# Altium PCB PCB_tasty_spoon.pcbdoc
Units mil, origin at the board's own origin, x right, y up, seen from the top; angles counter-clockwise.
Board outline 2425 x 4250 mil, 2 copper layers (Top Layer, Bottom Layer); 60 components, 42 nets, 208 pads, 55 vias.
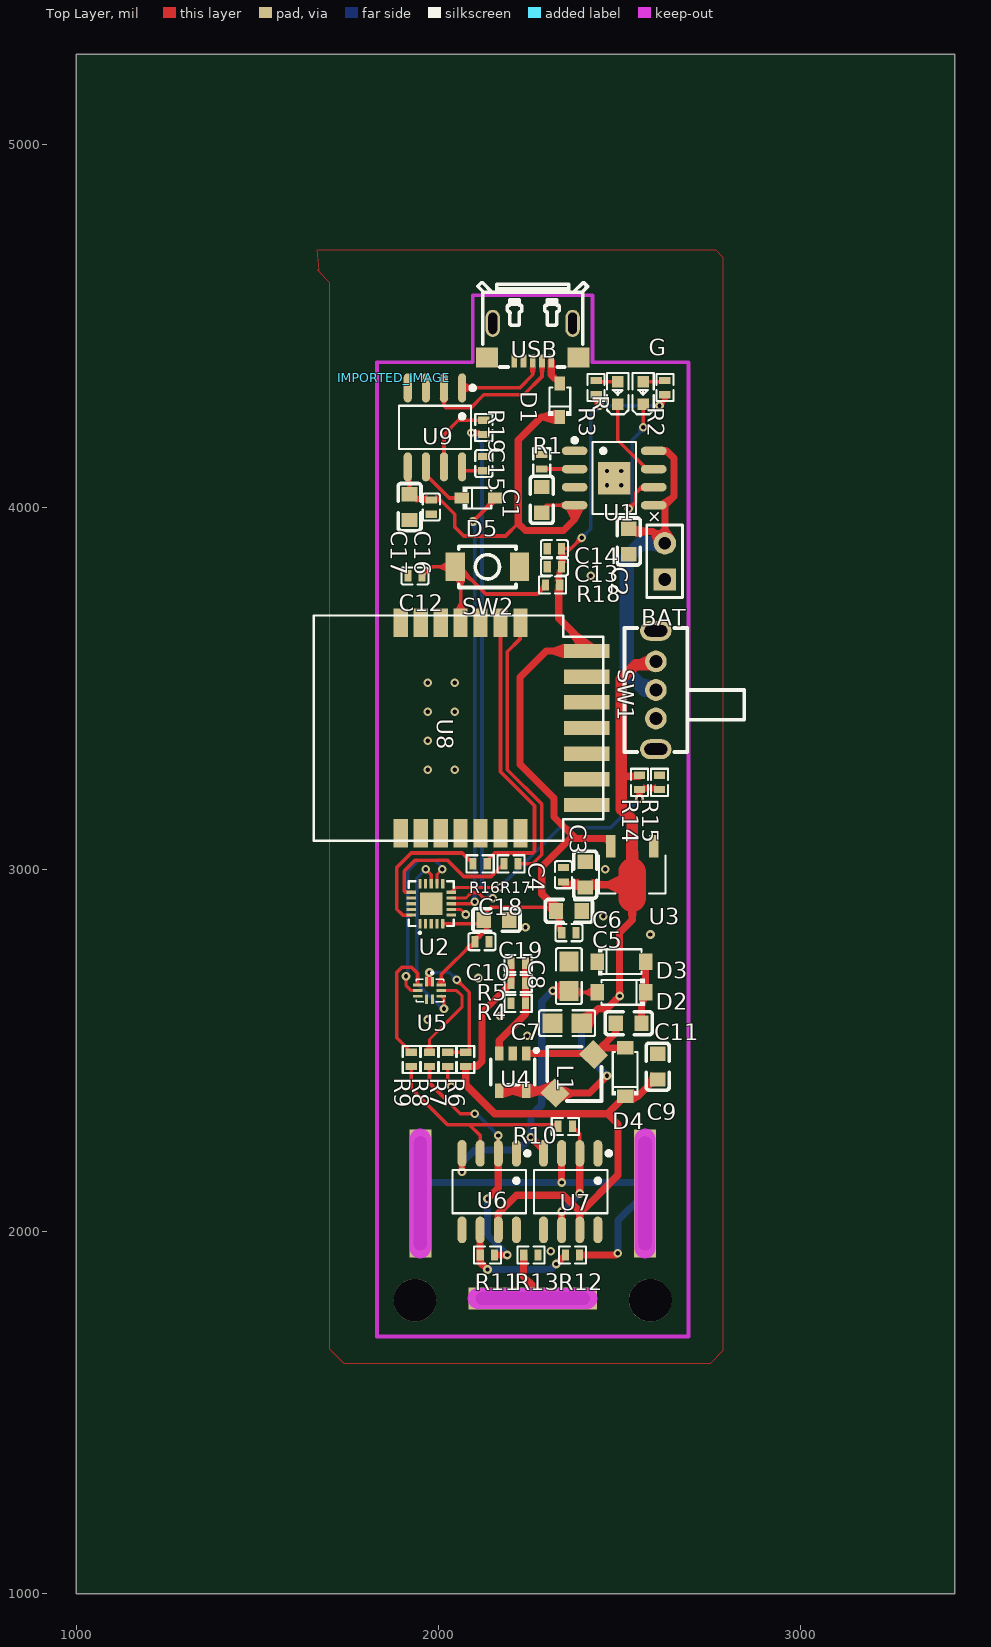
[diagram p0: Top Layer view]
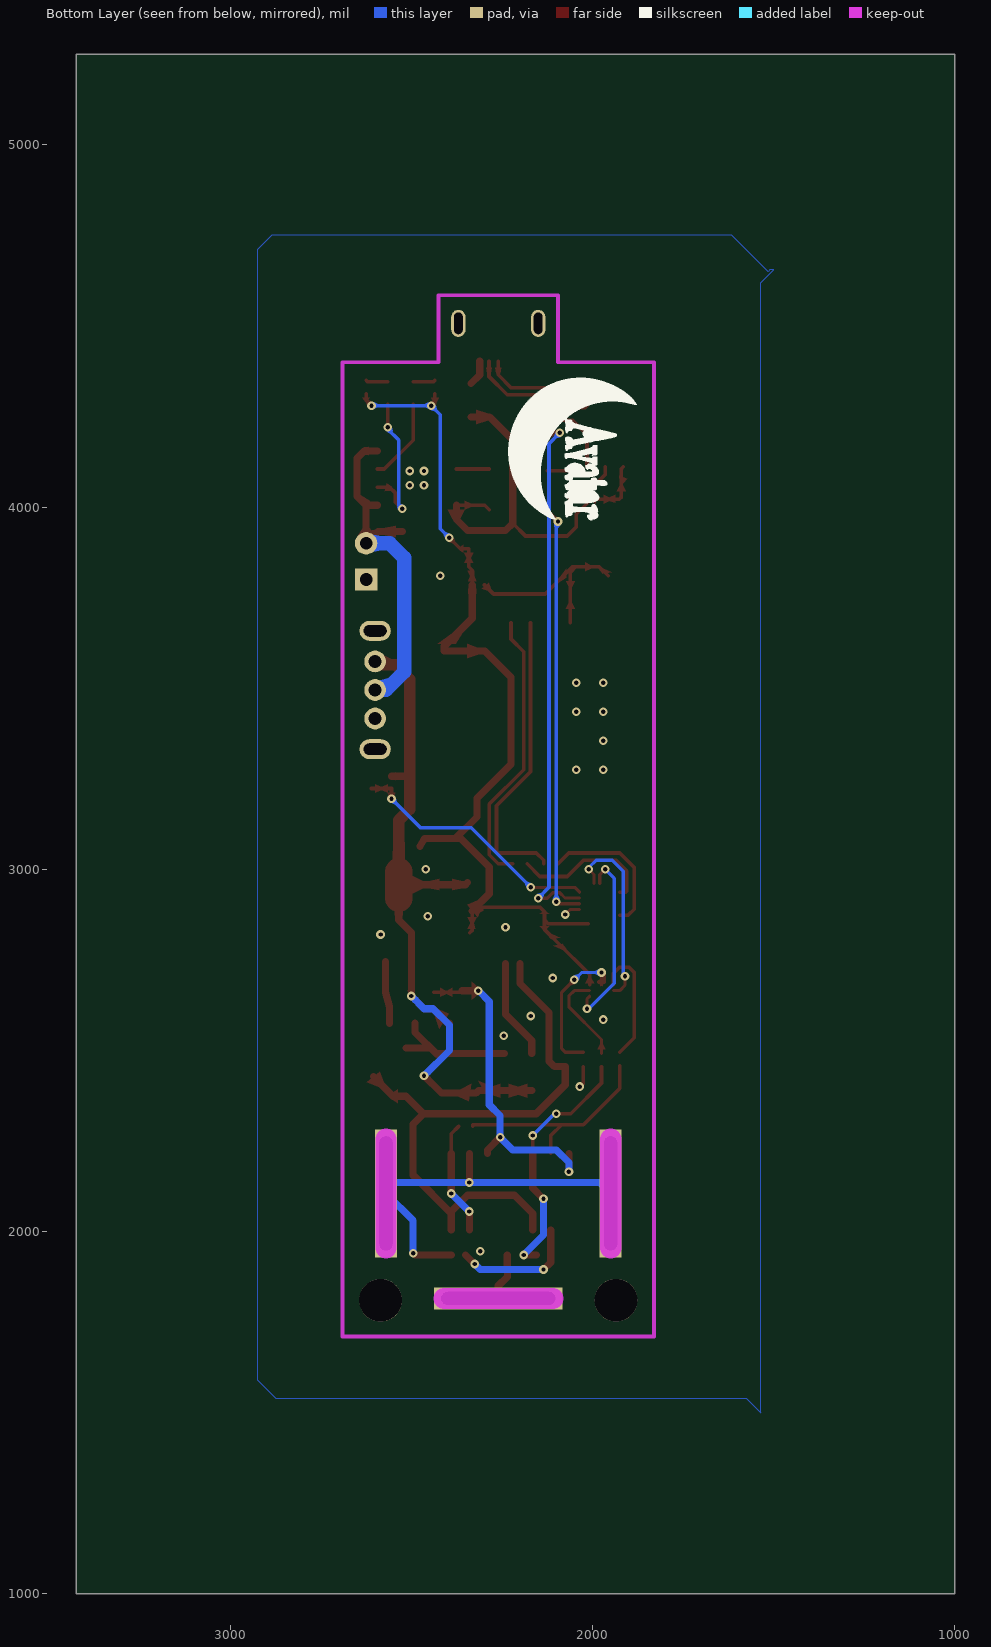
[diagram p1: Bottom Layer view, seen from below]

## Layer stack, top to bottom
Top Layer: signal copper (thickness not stored)
Dielectric: dielectric 12.6, FR-4, Dk 4.8
Bottom Layer: signal copper (thickness not stored)

## Board outline
3425,1000 1000,1000 1000,5250 3425,5250

## Components (designator, comment, footprint, x,y, rotation, side; value= is the part's Value field where it differs from the comment)
BAT "锂电池" HDR-F-2.54_1X2 2625,3850 r90 top
C1 "106" C0603 2285.03,4020 r270 top
C2 "10uF/16V" C0603 2525.03,3905 r90 top
C3 "106" C0603 2405.03,2985 r270 top
C4 "104" C0402 2344.99,2985 r270 top
C5 "104" C0402 2359.99,2825 r0 top
C6 "106" C0603 2360.03,2885 r180 top
C7 "4.7uF" C0805 2355,2575 r180 top
C8 "4.7uF" C0805 2360,2705 r270 top
C9 "1uF" C0603 2605.03,2455 r270 top
C10 "22pF" C0402 2220,2740 r180 top
C11 "1uF" C0603 2525,2575 r0 top
C12 "104/10V" C0402 1934.98,3810 r180 top
C13 "104" C0402 2319.99,3835 r0 top
C14 "103" C0402 2319.99,3885 r0 top
C15 "0.1uF/50V" C0402 2124.99,4120 r270 top
C16 "0.1uF/16V" C0402 1979.98,4000 r90 top
C17 "10uF/16V" C0603 1920.04,4000 r90 top
C18 "22uF/16V" C0603 2160.03,2860 r180 top
C19 "0.1uF/16V" C0402 2119.99,2800 r180 top
D1 "1N5819WS" SOD-323_L1.8-W1.3-LS2.5-RD 2335,4295 r90 top
D2 "MBR0530" SOD-123_L2.8-W1.8-LS3.7-RD 2505,2660 r180 top
D3 "MBR0530" SOD-123_L2.8-W1.8-LS3.7-RD 2505,2745 r0 top
D4 "MBR0530" SOD-123_L2.8-W1.8-LS3.7-RD 2515,2440 r90 top
D5 "1N5819WS" SOD-323_L1.8-W1.3-LS2.5-RD 2110,4025 r0 top
G "绿色" LED0603-RD 2565,4315 r90 top
IMPORTED_IMAGE "IMPORTED_IMAGE" IMPORTED_IMAGE 1877.84,4356.7 r0 top
L1 "6.8uH" IND-SMD_L3.8-W3.8_CDRH3D23NP 2375,2435 r270 top
R "红色" LED0603-RD 2495,4315 r90 top
R1 "2.2k" R0402 2284.96,4124.99 r270 top
R2 "102" R0402 2624.96,4329.99 r270 top
R3 "102" R0402 2434.96,4329.99 r90 top
R4 "210k/%1" R0402 2220,2630 r0 top
R5 "1.5M/%1" R0402 2220,2685 r180 top
R6 "100k/1%" R0402 2074.96,2474.99 r270 top
R7 "100k/1%" R0402 2024.96,2474.99 r90 top
R8 "10k/%1" R0402 1974.96,2474.99 r90 top
R9 "10k/%1" R0402 1924.96,2474.99 r90 top
R10 "10k/%1" R0402 2350,2290 r0 top
R11 "10k/%1" R0402 2135,1935 r180 top
R12 "39k/%1" R0402 2370,1935 r0 top
R13 "10k/%1" R0402 2254.96,1934.99 r180 top
R14 "100k/1%" R0402 2554.96,3239.99 r90 top
R15 "100k/1%" R0402 2609.96,3239.99 r270 top
R16 "100R" R0402 2115,3015 r180 top
R17 "100R" R0402 2200,3015 r180 top
R18 "100k/1%" R0402 2314.96,3784.99 r0 top
R19 "100R" R0402 2124.96,4219.99 r270 top
SW1 "SK12D07VG4" SW-TH_SK12D07VG4 2600,3495 r90 top
SW2 "TS-1088R" "SW-SMD L3.9-W3.0" 2135,3835 r0 top
U1 "XT2051Y2ASR-G" SOP-8_L4.9-W3.9-P1.27-LS6.0-BL-EP 2485,4080 r270 top
U2 "STC8G1K08-38I-QFN20" TQFN-20L_L3.0-W3.0-P0.40-BL-EP 1980,2905 r0 top
U3 "MD5333" SOT-89-3_L4.5-W2.5-P1.50-LS4.2-BR 2534.97,3009.99 r90 top
U4 "TPS61040DBVR" SOT-23-5_L3.0-W1.7-P0.95-LS2.8-BR 2205,2440 r90 top
U5 "RS2323XUTQK10" WQFN-10_L1.8-W1.4-P0.40-BL-EP 1975,2665 r180 top
U6 "OP07" SOP-8_L4.9-W3.9-P1.27-LS6.0-BL 2140,2110 r180 top
U7 "OP07" SOP-8_L4.9-W3.9-P1.27-LS6.0-BL 2365,2110 r180 top
U8 "BTU" BTU 2055,3390 r90 top
U9 "CH340N" SOP-8_L5.0-W4.0-P1.27-LS6.0-BL 1990,4220 r180 top
USB "U-F-M5DS-Y-8" MICRO-USB-SMD_U-F-M5DS-Y-8 2260,4455.03 r180 top

## Footprints (in the part's own frame and the unit in brackets; to place one, negate y for a bottom-side part, rotate by r counter-clockwise, add the part's x,y. Pads: shape width x height; smd on the part's side, far side on the other; paste and mask are expansions set on the pad)
BTU [mm]
  rect 2x1 smd: 1(-7.375,4.05) 2(-7.375,2.65) 3(-7.375,1.25) 4(-7.375,-0.15) 5(-7.375,-1.55) 6(-7.375,-2.95) 7(-7.375,-4.35) 15(7.375,-4.35) 16(7.375,-2.95) 17(7.375,-1.55) 18(7.375,-0.15) 19(7.375,1.25) 20(7.375,2.65) 21(7.375,4.05)
  rect 1x3.2 smd: 8(-5.4,-9) 9(-3.6,-9) 10(-1.8,-9) 11(0,-9) 12(1.8,-9) 13(3.6,-9) 14(5.4,-9)
  silkscreen extent -7.9,-10.15 7.9,10.15
C0402 [mm]
  rect 0.5x0.8 smd: 1(-0.5,0) 2(0.5,0)
  silkscreen extent -0.95,-0.6 0.95,0.6
C0603 [mm]
  rect 1x1.1 smd: 1(-0.9,0) 2(0.9,0)
  silkscreen extent -1.65,-0.8 1.65,0.8
C0805 [mm]
  rect 1.41x1.35 smd: 1(-1.03,0) 2(1.03,0)
  silkscreen extent -1.96,-0.9 1.96,0.9
HDR-F-2.54_1X2 [mil]
  rect 62x62 hole 35: 1(-50,0)
  round 62 hole 35: 2(50,0)
  silkscreen extent -100,-49 100,50
IMPORTED_IMAGE [mil]
IND-SMD_L3.8-W3.8_CDRH3D23NP [mm]
  rect 1.5x1.4 smd rot 45: 1(-1.35,1.35) 2(1.35,-1.35)
  silkscreen extent -1.9,-1.9 1.9,1.9
LED0603-RD [mm]
  rect 0.8x0.8 smd: 1(-0.799,-0.003) 2(0.799,0.004)
  silkscreen extent -1.49,-0.75 1.39,0.76
MICRO-USB-SMD_U-F-M5DS-Y-8 [mm]
  rect 0.4x0.9 smd: 1(-1.3,1.325) 2(-0.65,1.325) 3(0,1.325) 4(0.65,1.325) 5(1.3,1.325)
  rect 1.54x1.4 smd: 6(3.2,1.075) 7(-3.2,1.075)
  oval 1x1.9 hole 0.6 slot 1.5 at 90 deg: 8(-2.8,-1.326) 9(2.8,-1.326)
  silkscreen extent -3.85,-4.17 3.85,1.74
R0402 [mm]
  rect 0.5x0.8 smd: 1(-0.5,0) 2(0.5,0)
  silkscreen extent -0.95,-0.6 0.95,0.6
SOD-123_L2.8-W1.8-LS3.7-RD [mm]
  rect 0.95x1.15 smd: 1(-1.693,0) 2(1.693,0)
  silkscreen extent -1.63,-0.94 1.41,0.94
SOD-323_L1.8-W1.3-LS2.5-RD [mm]
  rect 1x0.75 smd: 1(-1.173,0) 2(1.173,0)
  silkscreen extent -1.08,-0.8 0.9,0.8
SOP-8_L4.9-W3.9-P1.27-LS6.0-BL [mm]
  oval 0.63x1.865 smd: 1(-1.905,-2.682) 2(-0.635,-2.682) 3(0.635,-2.682) 4(1.905,-2.682) 5(1.905,2.682) 6(0.635,2.682) 7(-0.635,2.682) 8(-1.905,2.682)
  silkscreen extent -2.82,-2.83 2.58,1.52
SOP-8_L4.9-W3.9-P1.27-LS6.0-BL-EP [mm]
  oval 0.6x1.8 smd: 1(-1.905,-2.773) 2(-0.635,-2.773) 3(0.635,-2.773) 4(1.905,-2.773) 5(1.905,2.773) 6(0.635,2.773) 7(-0.635,2.773) 8(-1.905,2.773)
  rect 2.29x2.29 smd: 9(0,0)
  silkscreen extent -2.8,-2.92 2.53,1.52
SOP-8_L5.0-W4.0-P1.27-LS6.0-BL [mil]
  oval 22.6x80.14 smd: 1(-75,-108.97) 2(-25,-108.97) 3(25,-108.97) 4(75,-108.97) 5(75,108.97) 6(25,108.97) 7(-25,108.97) 8(-75,108.97)
  silkscreen extent -110,-115 99,60
SOT-23-5_L3.0-W1.7-P0.95-LS2.8-BR [mm]
  rect 1x0.6 smd: 1(1.3,-0.95) 2(1.3,0) 3(1.3,0.95) 4(-1.3,0.95) 5(-1.3,-0.95)
  silkscreen extent -0.9,-1.78 1.65,1.55
SOT-89-3_L4.5-W2.5-P1.50-LS4.2-BR [mm]
  rect 1.575x0.672 smd: 1(1.356,-1.5) 3(1.356,1.5)
  round 0 smd: 2(-1.356,0.009)
  Top Layer region: -2.283,0.959 -0.429,0.959 -0.384,0.958 -0.34,0.955 -0.296,0.949 -0.252,0.942 -0.208,0.933 -0.165,0.921 -0.123,0.908 -0.081,0.893 -0.04,0.875 0,0.856 0.04,0.835 0.078,0.812 0.115,0.788 0.151,0.761 0.185,0.733 0.219,0.704 0.251,0.673 0.281,0.64 0.31,0.606 0.337,0.571 0.362,0.534 0.386,0.497 0.408,0.458 0.428,0.418 0.447,0.339 2.144,0.339 2.144,-0.321 0.447,-0.321 0.428,-0.401 0.408,-0.44 0.386,-0.479 0.362,-0.517 0.337,-0.553 0.31,-0.588 0.281,-0.622 0.251,-0.655 0.219,-0.686 0.185,-0.716 0.151,-0.744 0.115,-0.77 0.078,-0.795 0.04,-0.818 0,-0.839 -0.04,-0.858 -0.081,-0.875 -0.123,-0.89 -0.165,-0.904 -0.208,-0.915 -0.252,-0.925 -0.296,-0.932 -0.34,-0.937 -0.384,-0.94 -0.429,-0.941 -2.283,-0.941 -2.328,-0.94 -2.372,-0.937 -2.416,-0.932 -2.46,-0.925 -2.504,-0.915 -2.547,-0.904 -2.589,-0.89 -2.631,-0.875 -2.672,-0.858 -2.713,-0.839 -2.752,-0.818 -2.79,-0.795 -2.827,-0.77 -2.863,-0.744 -2.898,-0.716 -2.931,-0.686 -2.963,-0.655 -2.993,-0.622 -3.022,-0.588 -3.049,-0.553 -3.075,-0.517 -3.098,-0.479 -3.12,-0.44 -3.141,-0.401 -3.159,-0.36 -3.175,-0.318 -3.189,-0.276 -3.202,-0.233 -3.212,-0.19 -3.22,-0.146 -3.227,-0.102 -3.231,-0.058 -3.233,-0.013 -3.233,0.031 -3.231,0.076 -3.227,0.12 -3.22,0.164 -3.212,0.208 -3.202,0.251 -3.189,0.294 -3.175,0.336 -3.159,0.377 -3.141,0.418 -3.12,0.458 -3.098,0.497 -3.075,0.534 -3.049,0.571 -3.022,0.606 -2.993,0.64 -2.963,0.673 -2.931,0.704 -2.898,0.733 -2.863,0.761 -2.827,0.788 -2.79,0.812 -2.752,0.835 -2.713,0.856 -2.672,0.875 -2.631,0.893 -2.589,0.908 -2.547,0.921 -2.504,0.933 -2.46,0.942 -2.416,0.949 -2.372,0.955 -2.328,0.958
  silkscreen extent -1.95,-2.33 0.7,2.33
"SW-SMD L3.9-W3.0" [mm]
  rect 1.35x2 smd: 1(-2.25,0) 2(2.25,0)
  silkscreen extent -2,-1.45 2,1.45
SW-TH_SK12D07VG4 [mil]
  round 60 hole 36: 1(-78.74,0) 2(0,0) 3(78.74,0)
  oval 55.12x86.61 hole 31.5 slot 62.99 at 90 deg: 4(163.38,0) 5(-163.39,0)
  silkscreen extent -171,-244 171,87
TQFN-20L_L3.0-W3.0-P0.40-BL-EP [mm]
  rect 0.224x0.665 smd: 1(-0.8,-1.407) 2(-0.4,-1.407) 3(0,-1.407) 4(0.4,-1.407) 5(0.8,-1.407) 11(0.8,1.407) 12(0.4,1.407) 13(0,1.407) 14(-0.4,1.407) 15(-0.8,1.407)
  rect 0.665x0.224 smd: 6(1.407,-0.8) 7(1.407,-0.4) 8(1.407,0) 9(1.407,0.4) 10(1.407,0.8) 16(-1.407,0.8) 17(-1.407,0.4) 18(-1.407,0) 19(-1.407,-0.4) 20(-1.407,-0.8)
  rect 1.6x1.6 smd: 21(0,0)
  silkscreen extent -1.58,-2.11 1.58,1.58
WQFN-10_L1.8-W1.4-P0.40-BL-EP [mm]
  rect 0.2x0.665 smd: 1(-0.2,-0.607) 2(0.2,-0.607) 6(0.2,0.607) 7(-0.2,0.607)
  rect 0.665x0.2 smd: 3(0.832,-0.4) 4(0.832,0) 5(0.832,0.4) 8(-0.832,0.4) 9(-0.832,0) 10(-0.832,-0.4)
  silkscreen extent -0.99,-1.31 0.93,0.79

## Free pads (board coordinates)
  rect 60x354.33 hole 36 slot 314.96 at 90 deg: 2(1950,2105) 2(2570,2105)
  rect 354.33x60 hole 36 slot 314.96 at 0 deg: 2(2260,1815)
  round 118.11 hole 118.11 unplated: ""(1935,1810) ""(2585,1810)

## Via types
v1: diameter 24, hole 12, Top Layer to Bottom Layer, 55 vias

## Nets (pads, with @x,y where several pads share a name; then routed paths per layer and width w, separated by ;. In a path a pad name is that pad's centre, name@x,y a point inside that pad or via, vN(x,y) a via of type N, cw(c..) or ccw(c..) an arc to the next point about the centre after c; other vN are vias at no path point)
3V3: C5.1 C6.2 C13.2 C14.2 C18.2 C19.2 R2.2 R3.1 R18.2 U2.5 U3.3 U5.10 U8.14 | length 2765.9
  Top Layer w10: U5.10 2007.8,2709.2 2098.5,2800 2132.4,2833.9 C18.2@2132.4,2860 ; U2.5 2121.99,2849.59 C18.2@2132.4,2860 ; C6.2@2332,2885 2332,2895 2144.8,2895 2132.4,2882.6 C18.2@2132.4,2860 ; R18.2@2332,3785 2332,3825.6 2341.5,3835 2341.5,3885 2365,3885 v1(2395,3915) ; C6.2@2332.4,2885 2332.4,2831.1 C5.1@2338.5,2825 ; R3.1@2435,4313 2435,4290 v1(2445,4280) ; v1(2610,4280) 2625,4295 R2.2@2625,4313
  Top Layer w19.68: R18.2@2332,3785 2332,3693 2409.3,3615.7 U8.14 ; C6.2@2332.4,2885 2285,2932.4 2285,3006.3 2363.5,3084.8 2378.7,3084.7 ; U8.14@2408,3602.3 2297.3,3602.3 2225,3530 2225,3290 2318.7,3196.3 2318.7,3144.7 2378.7,3084.7 ; U3.3 2463.7,3084.7 2378.7,3084.7
  Bottom Layer w10: v1(2395,3915) 2420,3940 2420,4255 v1(2445,4280) v1(2610,4280)
5V: R6.1 R7.2 U5.1 U5.2 | length 397.4
  Top Layer w8.66: U5.2 1967.1,2707.1 v1(1975,2715) ; v1(2050,2695) 2085,2660 2085,2504.7 R6.1
  Top Layer w10: U5.2 U5.1 ; R7.2 R6.1
  Bottom Layer w8.66: v1(1975,2715) 2030,2715 v1(2050,2695)
ADC_VOLT: R14.1 R15.2 U2.10 | length 709.7
  Top Layer w8.66: U2.10 2048.91,2950 v1(2170,2950)
  Top Layer w10: v1(2555,3195) 2555,3223 R15.2@2610,3223
  Bottom Layer w10: v1(2170,2950) 2335,3115 2475,3115 v1(2555,3195)
C10_1: C10.1 R4.2 R5.1 U4.3 | length 278.7
  Top Layer w19.68: U4.3 2167.6,2527.6 2239.7,2599.7 R4.2 R5.1 C10.1
C11_1: C11.1 D4.2 L1.1 U4.1 | length 393.8
  Top Layer w19.68: U4.1 2425.12,2491.18 L1.1@2428.15,2488.15 ; C11.1 2489.57,2549.57 L1.1@2428.15,2488.15 ; D4.2 2446.63,2506.63 L1.1@2428.15,2488.15
C11_2: C11.2 D2.1 D3.2 | length 171.7
  Top Layer w19.68: C11.2 2560,2620 D2.1 D3.2
C15_2: C15.2 U9.8 | length 70.7
  Top Layer w10: U9.8 2065,4100.3 C15.2
D1_2: D1.2 USB.1 | length 71.6
  Top Layer w19.68: USB.1 2311.2,4365 D1.2
D5_1: D5.1 U9.6 | length 146.8
  Top Layer w10: U9.6 1965,4090 2030,4025 D5.1
D+: U9.1 USB.3 | length 247.8
  Top Layer w10: U9.1 2224,4329 2260,4365 USB.3
D-: U9.2 USB.2 | length 399.4
  Top Layer w10: U9.2 2015,4280 2020,4275 2090,4275 2125,4310 2235,4310 2285.6,4360.6 USB.2
G_2: G.2 R2.1 | length 61.4
  Top Layer w10: G.2 2621.76,4346.47 R2.1
GND: BAT.1 C1.1 C2.1 C3.1 C4.1 C5.2 C6.1 C7.2 C8.1 C9.1 C12.2 C13.1 C14.1 C15.1 C16.1 C17.1 C18.1 C19.1 D3.1 R1.1 R4.1 R7.1 R13.1 R15.1 SW1.4 SW1.5 SW2.2 U1.1 U1.3 U1.9 U2.7 U3.1 U4.2 U5.5 U5.6 U5.7 U8.13 U9.3 USB.4 USB.5 USB.6 USB.7 USB.8 USB.9 | length 105
  Top Layer w8.66: U2.7@2035.41,2889.25 2060.75,2889.25 v1(2075,2875)
  Top Layer w10: R7.1 2024.96,2410.04 v1(2035,2400)
  other v1: 2310,1945 2245,2540 1970,2585 2170,2595 2110,2700 2585,2820 2240,2840 2455,2870 2460,3000 1970,3275 2045,3275 1970,3355 1970,3435 2045,3435 1970,3515 2045,3515 2420,3810 2465.31,4060.31 2504.68,4060.31 2465.31,4099.68 2504.68,4099.68
IN1: U2.12 U5.4 | length 524.4
  Top Layer w8.66: v1(1910,2705) 1910,2680 1925,2665 U5.4@1942,2665 ; U2.12@1995.75,2960.41 1995.75,2985.75 v1(2010,3000)
  Bottom Layer w8.66: v1(1910,2705) 1915,2705 1915,2995 1945,3025 1990,3025 2010,3005 v1(2010,3000)
IN2: U2.13 U5.8 | length 512.4
  Top Layer w8.66: v1(1965,3000) 1980,2985 U2.13 ; U5.8 2015,2642.1 v1(2015,2615)
  Bottom Layer w8.66: v1(1965,3000) 1940,2975 1940,2685 2010,2615 v1(2015,2615)
LED1: G.1 U1.6 | length 413.8
  Top Layer w10: v1(2525,3995) 2545,4015 2545,4040 2560,4055 U1.6 ; v1(2565,4220) 2565.14,4220.14 G.1
  Bottom Layer w10: v1(2525,3995) 2535,4005 2535,4185 2565,4215 v1(2565,4220)
LED2: R.1 U1.7 | length 230.8
  Top Layer w10: R.1 2495.14,4184.86 2575,4105 U1.7
P1: pad.2@2260,1815 R13.2 | length 130.4
  Top Layer w19.68: R13.2 2235,1875 2260,1850 pad.2@2260,1815
P2: pad.2@1950,2105 pad.2@2570,2105 R12.2 U7.3 | length 1016.5
  Top Layer w19.68: v1(2340,2135) U7.3 ; R12.2 2490,1935 v1(2495,1940)
  Bottom Layer w19.68: pad.2@1950,2105 1980,2135 v1(2340,2135) pad.2@2570,2135 ; v1(2495,1940) 2495,2030 pad.2@2570,2105
R1_2: R1.2 U1.2 | length 90.8
  Top Layer w10: R1.2 U1.2
R3_2: R3.2 R.2 | length 61.2
  Top Layer w10: R3.2 2438.16,4346.48 R.2
R8_1: R8.1 R11.1 U6.2 | length 679.8
  Top Layer w10: R8.1 1974.96,2410.04 2060,2325 v1(2100,2325) ; U6.2@2165,2231.68 v1(2165,2265)
  Top Layer w19.68: v1(2135,2090) 2165,2120 U6.2 ; R11.1 v1(2190,1935)
  Bottom Layer w10: v1(2100,2325) 2105,2325 v1(2165,2265)
  Bottom Layer w19.68: v1(2135,2090) 2135,1990 v1(2190,1935)
R10_2: R10.2 U7.2 U7.6 | length 314.7
  Top Layer w10: R10.2 2390,2269.68 U7.2
  Top Layer w19.68: U7.6 v1(2340,2055) ; v1(2390,2105) U7.2
  Bottom Layer w19.68: v1(2340,2055) v1(2390,2105)
R11_2: R11.2 R12.1 U6.6 | length 349.7
  Top Layer w19.68: U6.6 2115,1935 R11.2 2115.32,1914.68 v1(2135,1895) ; v1(2325,1910) 2325.31,1910 R12.1
  Bottom Layer w19.68: v1(2135,1895) 2310,1895 v1(2325,1910)
R19_1: R19.1 U9.7 | length 215.4
  Top Layer w10: U9.7 2015,4200 2054.67,4239.67 R19.1
RXD: D5.2 U2.8 | length 1207
  Top Layer w8.66: U2.8 v1@2100,2905
  Top Layer w10: v1(2095,3960) 2156.2,4021.2 D5.2
  Bottom Layer w10: v1(2095,3960) 2100,3955 2100,2955 v1(2100,2910)
RXD1: R17.2 U2.16 | length 396.9
  Top Layer w10: U2.16 1908.5,2936.5 1905,2940 1905,2995 1935,3025 2025,3025 2070,2980 2145.3,2980 R17.2
S$2487: 
S$4958: 
TXD: R19.2 U2.9 | length 1472.4
  Top Layer w8.66: U2.9@2035.41,2920.75 2075.98,2920.75 2090.23,2935 2110,2935 2125,2920 v1(2150,2920)
  Top Layer w10: v1(2090,4205) 2123,4205 R19.2@2125,4203
  Bottom Layer w10: v1(2090,4205) 2120,4175 2120,2950 v1(2150,2920)
TXD1: R16.2 U2.20 | length 400.7
  Top Layer w10: U2.20 1901.5,2873.5 1885,2890 1885,3005 1925,3045 2065.31,3045 R16.2
U6_3: R9.1 R10.1 U6.3 | length 619.6
  Top Layer w10: R9.1@1925,2458 1925,2395 2025,2295 2330.3,2295 R10.1 ; 2071.98,2295 2085,2295 2115,2265 U6.3
U8_15: R17.1 U8.15 | length 769.5
  Top Layer w10: R17.1 2260,3015 2285,3040 2285,3180 2190,3275 2190,3600.9 2225,3635.9 U8.15@2225,3680
U8_16: R16.1 U8.16 | length 819.7
  Top Layer w10: R16.1 2134.7,3024.7 2155,3045 2260,3045 2265,3050 2265,3175 2171.1,3268.9 U8.16@2171.1,3680.3
U8_18: C12.1 R18.1 SW2.1 U8.18 | length 554
  Top Layer w10: C12.1@1956.5,3810 1981.5,3835 SW2.1 ; U8.18@2060.9,3680.3 2060.9,3820.5 SW2.1 ; R18.1@2298,3785 2273,3760 2130,3760 2055,3835 SW2.1
USB_5V: C1.2 C16.2 C17.2 D1.1 U1.4 U9.5 | length 1148.5
  Top Layer w10: U9.5 1920,4106 1920,4027.6 1926.1,4021.5 1980,4021.5 2003.5,4021.5 2045,3980 2045,3945 2070,3920 2185,3920 2220,3955 ; C1.2@2285,3992.4 2297.6,4005 U1.4
  Top Layer w19.68: D1.1 2283.8,4248.8 2220,4185 2220,3955 2240,3935 2345,3935 2375.8,3965.8 U1.4
V+: R9.2 U5.3 | length 339.5
  Top Layer w10: R9.2 1885,2534.6 1885,2715 1900,2730 1925,2730 1942.2,2712.8 U5.3
V-: R8.2 U5.9 | length 258.7
  Top Layer w8.66: R8.2@1975,2492 1975,2530 2065,2620 2065,2650 2050,2665 U5.9
VBAT: BAT.2 C2.2 SW1.2 U1.5 U1.8 | length 1021.8
  Top Layer w19.68: C2.2@2525,3932.6 2592.4,3932.6 BAT.2 U1.5@2625,4005 ; U1.8 2630,4155 2650,4135 2650,4030 U1.5@2625,4005 ; U1.5@2625,4005 U1.5 U1.5@2625,4005
  Bottom Layer w39.37: SW1.2 2570,3495 2520,3545 2520,3860 2560,3900 BAT.2
VBAT_BOOST_10V: C9.2 C10.2 D4.1 R5.2 R6.2 U6.7 U7.7 | length 1746.6
  Top Layer w19.68: R6.2 2105.3,2455.3 2120,2470 2120,2604.68 R5.2 C10.2 ; R6.2 2075,2405 2155,2325 2466.6,2325 ; U6.7 2165,2050 2215,2100 2345,2100 2390,2055 U7.7 2390,2050 2495,2155 2495,2296.6 2466.6,2325 ; C9.2@2605,2427.4 2560.9,2383.3 2550.9,2373.4 D4.1 2466.6,2325
VBAT_BOOST_-10V: C8.2 D2.2 U6.4 U7.4 | length 908.8
  Top Layer w10: C8.2@2360,2664.5 2364.5,2660 D2.2
  Top Layer w19.68: v1(2065,2165) U6.4 ; v1(2255,2260) 2290,2225 U7.4 ; v1(2315,2665) 2315.5,2664.5 C8.2@2360,2664.5
  Bottom Layer w19.68: v1(2065,2165) 2065,2190 2100,2225 2220,2225 v1(2255,2260) 2255,2320 2285,2350 2285,2635 v1(2315,2665)
VBAT_OUT: C3.2 C4.2 C7.1 L1.2 R14.2 SW1.3 U3.2 U4.4 U4.5 | length 2022.2
  Top Layer w19.68: U4.4 U4.5 2314.9,2388.8 2321.9,2381.9 2416.9,2381.9 v1(2465,2430) ; C4.2@2345,2963.5 2351.1,2957.4 2405,2957.4 2533.8,2957.4 2534.7,2956.6 2534.7,2859.7 2500,2825 v1(2500,2650) 2465,2615 2440,2615 2400,2575 C7.1@2395.5,2575 ; 2505,3257 R14.2@2555,3257
  Top Layer w31.5: 2534.7,2956.6 2534.7,3135.3 2505,3165 2505,3525 2545,3565 2591.3,3565 SW1.3
  Bottom Layer w19.68: v1(2465,2430) 2395,2500 2395,2570 2440,2615 2465,2615 v1(2500,2650)
pads on no net: SW1.1 U2.1 U2.2 U2.3 U2.4 U2.6 U2.11 U2.14 U2.15 U2.17 U2.18 U2.19 U2.21 U6.1 U6.5 U6.8 U7.1 U7.5 U7.8 U8.1 U8.2 U8.3 U8.4 U8.5 U8.6 U8.7 U8.8 U8.9 U8.10 U8.11 U8.12 U8.17 U8.19 U8.20 U8.21 U9.4

## Polygon pours and split planes (outlines as drawn)
GND on Bottom Layer (solid): 1615,4750 2885,4750 2925,4710 2925,1590 2875,1540 1575,1540 1535,1500 1535,4620 1500,4655 1510,4655 1515,4650
GND on Top Layer (solid): 1665,4710 2765,4710 2785,4690 2785,1670 2750,1635 1740,1635 1700,1675 1700,4620 1665,4655 1670,4655

## Other copper
Top Layer:
  region net VBAT_OUT: 2585.43,3547.52 2575.8,3591.47 2556.65,3580.75 2563.55,3549.25
  region net VBAT: 2648.25,3920.5 2601.75,3920.5 2615.16,3942.2 2634.84,3942.2
  region net VBAT: 2594.06,3898.06 2626.94,3930.94 2602.12,3936.8 2588.2,3922.88
  region net 3V3: 2445.75,4291.98 2433.02,4279.25 2431.46,4286.46 2438.54,4293.54
  region net 3V3: 2621.98,4279.25 2609.25,4291.98 2618.02,4295.09 2625.09,4288.02
  region net TXD: 2097.94,4196 2097.94,4214 2106.34,4210 2106.34,4200
  region net RXD: 2106.98,3959.25 2094.25,3971.98 2103.02,3975.09 2110.09,3968.02
  region net ADC_VOLT: 2546,3202.94 2564,3202.94 2560,3211.34 2550,3211.34
  region net LED1: 2536.98,3994.25 2524.25,4006.98 2533.02,4010.09 2540.09,4003.02
  region net 3V3: 2395.75,3903.02 2383.02,3915.75 2379.91,3906.98 2386.98,3899.91
  region net VBAT_BOOST_-10V: 2323.24,2673.73 2322.63,2655.74 2331,2654.61 2331.66,2674.29
  region net VBAT_OUT: 2465.75,2418.02 2453.02,2430.75 2446.49,2425.41 2460.41,2411.49
  region net VBAT_OUT: 2500.75,2638.02 2488.02,2650.75 2481.49,2645.41 2495.41,2631.49
  region net VBAT_OUT: 2491,2657.94 2509,2657.94 2509.84,2666.34 2490.16,2666.34
  region net 5V: 2061.98,2695.75 2049.25,2683.02 2058.49,2680.39 2064.61,2686.51
  region net 5V: 1963.29,2712.38 1979.06,2703.71 1971.46,2698.3 1962.8,2703.06
  region net VBAT: 2542.72,3948.31 2542.72,3916.81 2572.24,3922.72 2572.24,3942.4
  region net VBAT_OUT: 2422.72,2973.19 2422.72,2941.69 2452.24,2947.6 2452.24,2967.28
  region net VBAT_OUT: 2387.28,2941.69 2387.28,2973.19 2357.76,2967.28 2357.76,2947.6
  region net 3V3: 2344.94,2835.63 2322.99,2835.63 2327.44,2850.63 2337.44,2850.63
  region net 3V3: 2316.69,2877.5 2316.69,2902.5 2301.69,2895 2301.69,2885
  region net 3V3: 2316.69,2867.28 2346.16,2902.72 2317.22,2914.1 2304.58,2898.9
  region net 3V3: 2344.94,2867.28 2319.94,2867.28 2327.44,2852.28 2337.44,2852.28
  region net VBAT_OUT: 2397.38,2601.57 2423.31,2559.75 2435.32,2596.41 2424.67,2613.59
  region net VBAT_BOOST_-10V: 2333.43,2639.84 2333.43,2689.06 2315.55,2674.29 2315.55,2654.61
  region net VBAT_BOOST_-10V: 2386.57,2672.5 2386.57,2647.5 2401.57,2655 2401.57,2665
  region net VBAT_BOOST_10V: 2622.71,2411.69 2587.28,2441.16 2575.9,2412.22 2591.1,2399.58
  region net U8_18: 1947.4,3820.63 1972.01,3816.22 1983.02,3829.49 1971.02,3831.64
  region net 3V3: 2328.96,3845.63 2353.96,3845.63 2346.46,3860.63 2336.46,3860.63
  region net 3V3: 2344.54,3824.37 2325.91,3824.37 2327.04,3809.37 2337.04,3809.37
  region net 3V3: 2353.96,3874.37 2328.96,3874.37 2336.46,3859.37 2346.46,3859.37
  region net 3V3: 2357.01,3895.63 2357.01,3874.37 2365,3880 2365,3890
  region net USB_5V: 1969.37,4008.96 1969.37,4033.96 1954.37,4026.46 1954.37,4016.46
  region net USB_5V: 1990.63,4033.96 1990.63,4008.96 2003.54,4016.46 2003.54,4026.46
  region net USB_5V: 1907.5,4043.31 1932.5,4043.31 1925,4058.31 1915,4058.31
  region net USB_5V: 1937.72,4033.96 1937.72,4011.81 1952.72,4016.46 1952.72,4026.46
  region net 3V3: 2119.94,2877.7 2144.94,2877.7 2137.44,2882.56 2127.44,2882.56
  region net 3V3: 2144.94,2842.3 2119.94,2842.3 2127.44,2833.9 2137.44,2833.9
  region net 3V3: 2089.49,2810.63 2114.09,2806.23 2125.1,2819.49 2113.11,2821.64
  region net 3V3: 2107.6,2789.37 2082.99,2793.78 2071.98,2780.51 2083.98,2778.36
  region net USB_5V: 2320.24,4229.15 2320.24,4268.52 2290.71,4258.68 2290.71,4239
  region net VBAT_BOOST_-10V: 2419.67,2647.5 2419.67,2672.5 2404.67,2665 2404.67,2655
  region net VBAT_BOOST_10V: 2537.64,2392.07 2537.64,2354.67 2550.9,2363.56 2550.9,2383.24
  region net RXD: 2157.74,4010.24 2136.48,4010.24 2123.17,3995.24 2137.31,3995.24
  region net VBAT_OUT: 2334.41,2408.27 2341.3,2359.54 2369.36,2372.01 2366.57,2391.69
  region net VBAT_OUT: 2290.78,2373.94 2315.02,2416.78 2270.84,2398.65 2259.7,2378.97
  region net 3V3: 2635.63,4301.83 2614.37,4301.83 2620,4295 2630,4295
  region net 3V3: 2424.37,4301.83 2445.63,4301.83 2440,4290 2430,4290
  region net V-: 1964.37,2503.17 1985.63,2503.17 1979.33,2516.17 1970.67,2516.17
  region net VBAT_OUT: 2544.37,3245.91 2544.37,3268.17 2514.84,3266.88 2514.84,3247.2
  region net ADC_VOLT: 2565.63,3211.83 2565.63,3234.09 2580.63,3227.96 2580.63,3217.96
  region net ADC_VOLT: 2544.37,3211.83 2565.63,3211.83 2560,3196.83 2550,3196.83
  region net ADC_VOLT: 2599.37,3211.83 2599.37,3234.09 2584.37,3227.96 2584.37,3217.96
  region net 3V3: 2343.17,3774.37 2320.91,3774.37 2322.16,3744.84 2341.84,3744.84
  region net 3V3: 2320.91,3795.63 2343.17,3795.63 2337.04,3810.63 2327.04,3810.63
  region net U8_18: 2305.71,3774.37 2286.83,3790.75 2281.45,3775.56 2289.02,3768.99
  region net TXD: 2114.37,4192.5 2114.37,4214.09 2099.37,4210 2099.37,4200
  region net U8_18: 2019.84,3822.5 2019.84,3847.5 2004.84,3840 2004.84,3830
  region net U8_18: 2072.99,3795.63 2048.4,3795.63 2055.9,3780.63 2065.9,3780.63
  region net U8_18: 2072.99,3829.51 2072.99,3804.51 2087.99,3794.94 2087.99,3809.08
  region net 5V: 1978.93,2676.42 1978.93,2701.42 1967.13,2693.92 1967.13,2683.92
  region net 5V: 1971.07,2701.42 1971.07,2676.42 1982.87,2683.92 1982.87,2693.92
  region net 3V3: 1995.27,2684.69 2020.27,2684.69 2012.77,2699.69 2002.77,2699.69
  region net U8_18: 2048.4,3719.7 2073.4,3719.7 2065.9,3734.7 2055.9,3734.7
  region net 3V3: 2378.09,3622.3 2427.31,3622.3 2387.09,3651.83 2359.25,3651.83
  region net 3V3: 2346.3,3582.9 2346.3,3622.3 2316.77,3612.14 2316.77,3592.46
  region net VBAT_OUT: 2254.21,2408.5 2254.21,2369.13 2283.74,2378.97 2283.74,2398.65
  region net VBAT_OUT: 2230.59,2369.13 2230.59,2408.5 2201.06,2398.65 2201.06,2378.97
  region net VBAT_OUT: 2179.41,2408.5 2179.41,2369.13 2208.94,2378.97 2208.94,2398.65
  region net D-: 2293.46,4385.15 2277.71,4385.15 2280.59,4370.15 2290.59,4370.15
  region net D+: 2267.87,4385.15 2252.13,4385.15 2255,4370.15 2265,4370.15
  region net VBAT_OUT: 2518.54,3026.86 2550.77,3026.86 2550.45,3074.1 2518.95,3074.1
  region net VBAT_OUT: 2497.25,2932.83 2497.25,2982.05 2467.72,2967.28 2467.72,2947.6
  region net VBAT_OUT: 2545.88,2884.43 2523.43,2884.43 2524.86,2859.7 2544.54,2859.7
  region net USB_5V: 2352.23,3993.19 2352.23,4016.81 2337.23,4010 2337.23,4000
  region net USB_5V: 2399.47,3993.19 2352.23,3993.19 2366.01,3965.85 2385.69,3965.85
  region net VBAT: 2617.77,4143.19 2617.77,4166.81 2630,4164.84 2630,4145.16
  region net LED1: 2573.63,4043.6 2567.42,4066.4 2554.54,4056.61 2557.57,4045.5
  region net VBAT: 2614.73,4016.81 2620.72,3993.56 2650.04,4016.12 2639.3,4033.22
  region net D+: 2076.3,4341.47 2076.3,4316.47 2091.3,4323.97 2091.3,4333.97
  region net D-: 2026.3,4300.2 2003.7,4300.2 2010,4285.2 2020,4285.2
  region net USB_5V: 1925.65,4086.03 1904.35,4078.49 1915,4066.35 1925,4069.89
Bottom Layer:
  region net VBAT: 2586.05,3521.56 2575.39,3477.84 2554.86,3482.3 2565.78,3527.06
  region net VBAT: 2604.5,3876.75 2604.5,3923.25 2582.8,3919.68 2582.8,3880.32
  region net 3V3: 2452.94,4271 2452.94,4289 2461.34,4285 2461.34,4275
  region net 3V3: 2445.75,4268.02 2433.02,4280.75 2429.91,4271.98 2436.98,4264.91
  region net 3V3: 2602.06,4271 2602.06,4289 2593.66,4285 2593.66,4275
  region net TXD: 2101.98,4205.75 2089.25,4193.02 2098.02,4189.91 2105.09,4196.98
  region net TXD: 2150.75,2931.98 2138.02,2919.25 2134.91,2928.02 2141.98,2935.09
  region net RXD: 2088.86,3949.69 2106,3955.2 2105,3946.05 2095,3942.84
  region net RXD: 2091,2917.94 2109,2917.94 2105,2926.34 2095,2926.34
  region net ADC_VOLT: 2555.75,3183.02 2543.02,3195.75 2539.91,3186.98 2546.98,3179.91
  region net ADC_VOLT: 2181.98,2949.25 2169.25,2961.98 2178.02,2965.09 2185.09,2958.02
  region net LED1: 2553.14,4218.14 2568.33,4208.47 2560.54,4203.47 2551.9,4208.97
  region net LED1: 2536.98,3994.25 2524.25,4006.98 2531.46,4008.54 2538.54,4001.46
  region net 3V3: 2406.98,3914.25 2394.25,3926.98 2403.02,3930.09 2410.09,3923.02
  region net VBAT_OUT: 2465.75,2441.98 2453.02,2429.25 2446.49,2434.59 2460.41,2448.51
  region net VBAT_OUT: 2500.75,2638.02 2488.02,2650.75 2481.49,2645.41 2495.41,2631.49
  region net 5V: 2050.75,2706.98 2038.02,2694.25 2035.39,2703.49 2041.51,2709.61
  region net 5V: 1982.94,2706 1982.94,2724 1991.34,2719.33 1991.34,2710.67

## Silkscreen, mask and mechanical layers (free items; w line width, h text height)
Top Overlay:
  text "+" at 2623.92,3968.92 h39.37 r135